# Altium PCB 练一练2.PcbDoc
Units mm, origin at the board's own origin, x right, y up, seen from the top; angles counter-clockwise.
Board outline 63.12 x 67.17 mm, 2 copper layers (Top Layer, Bottom Layer); 89 components, 74 nets, 357 pads, 100 vias.
Unrouted connection lines stored in the file: 59.
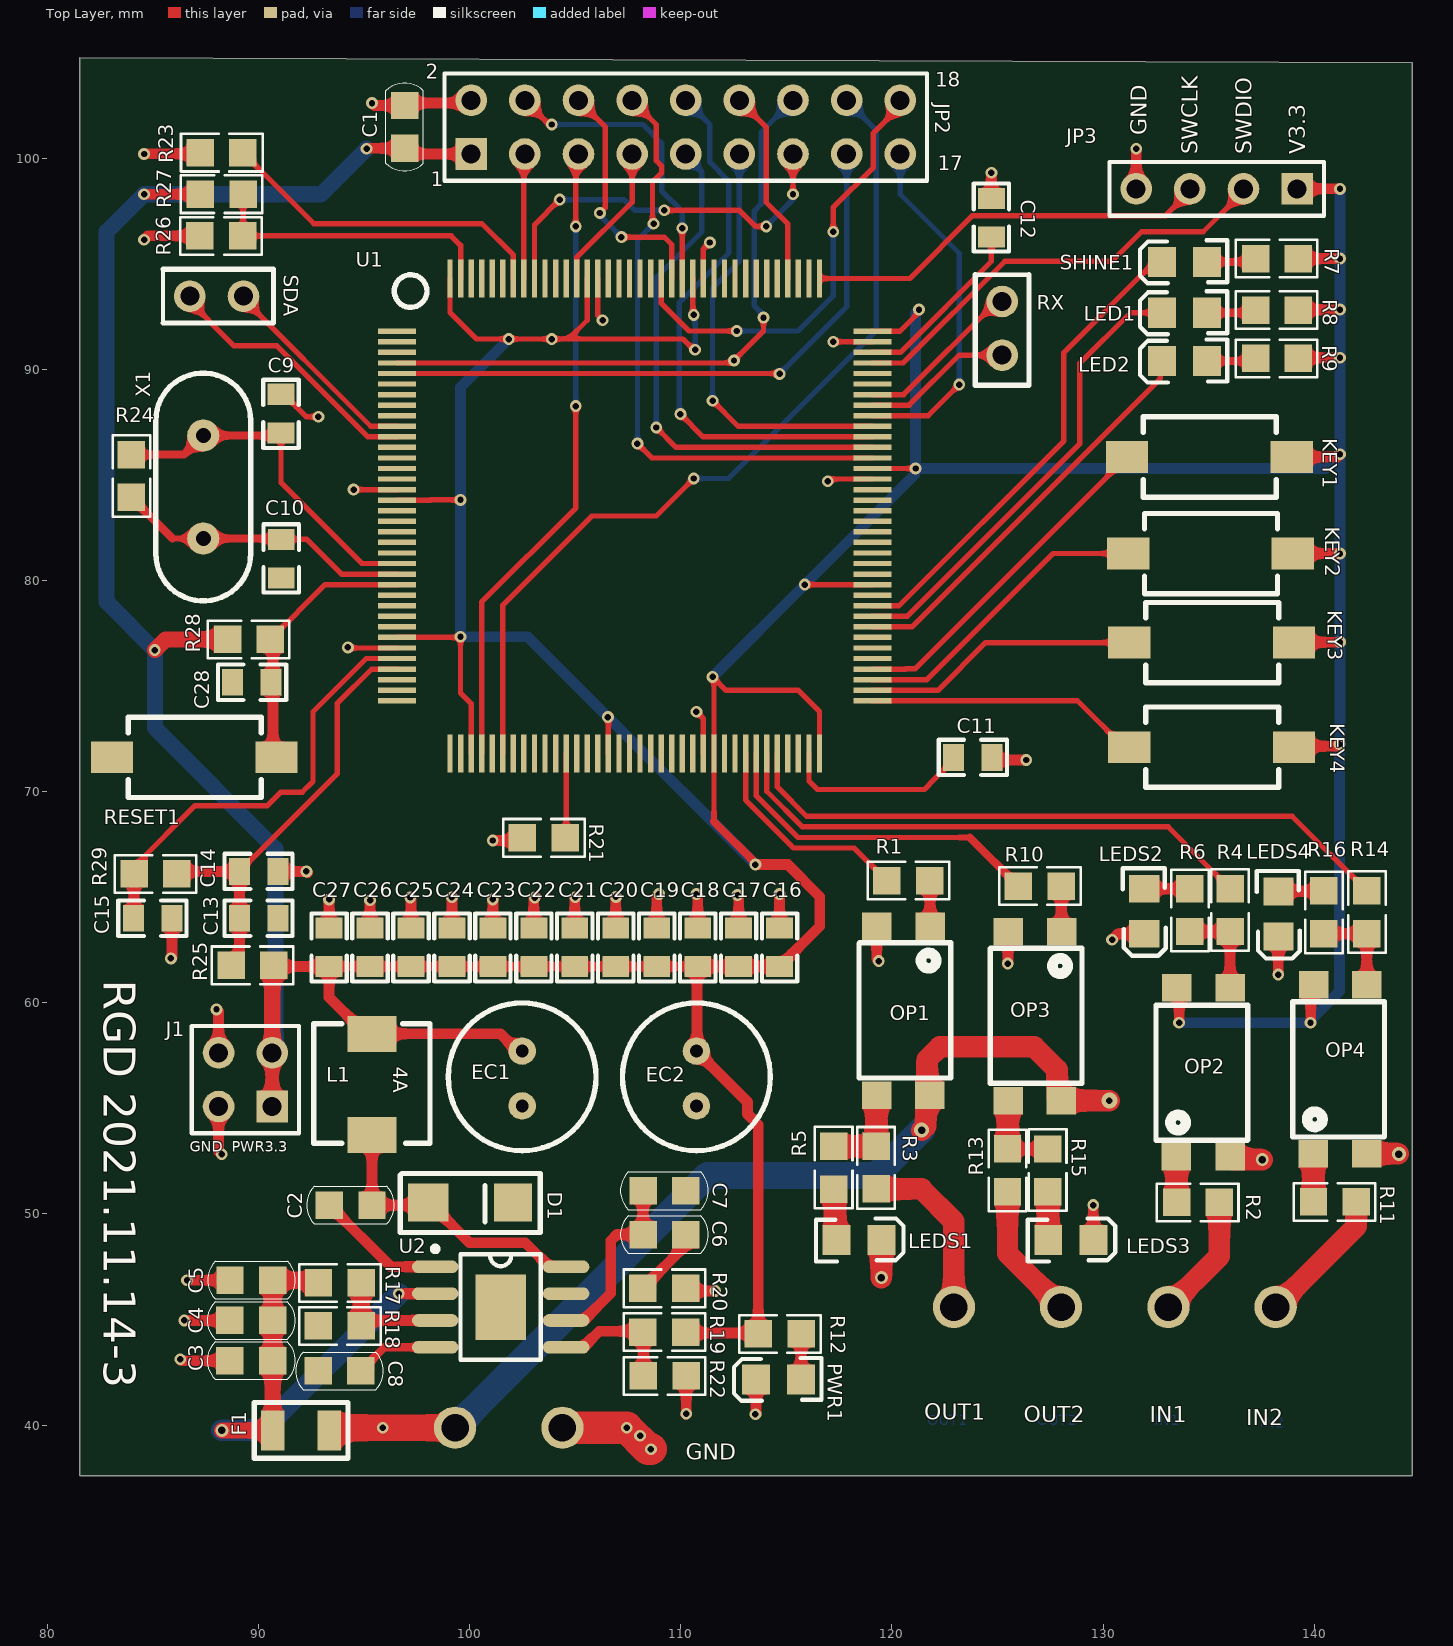
[diagram p0: Top Layer view]
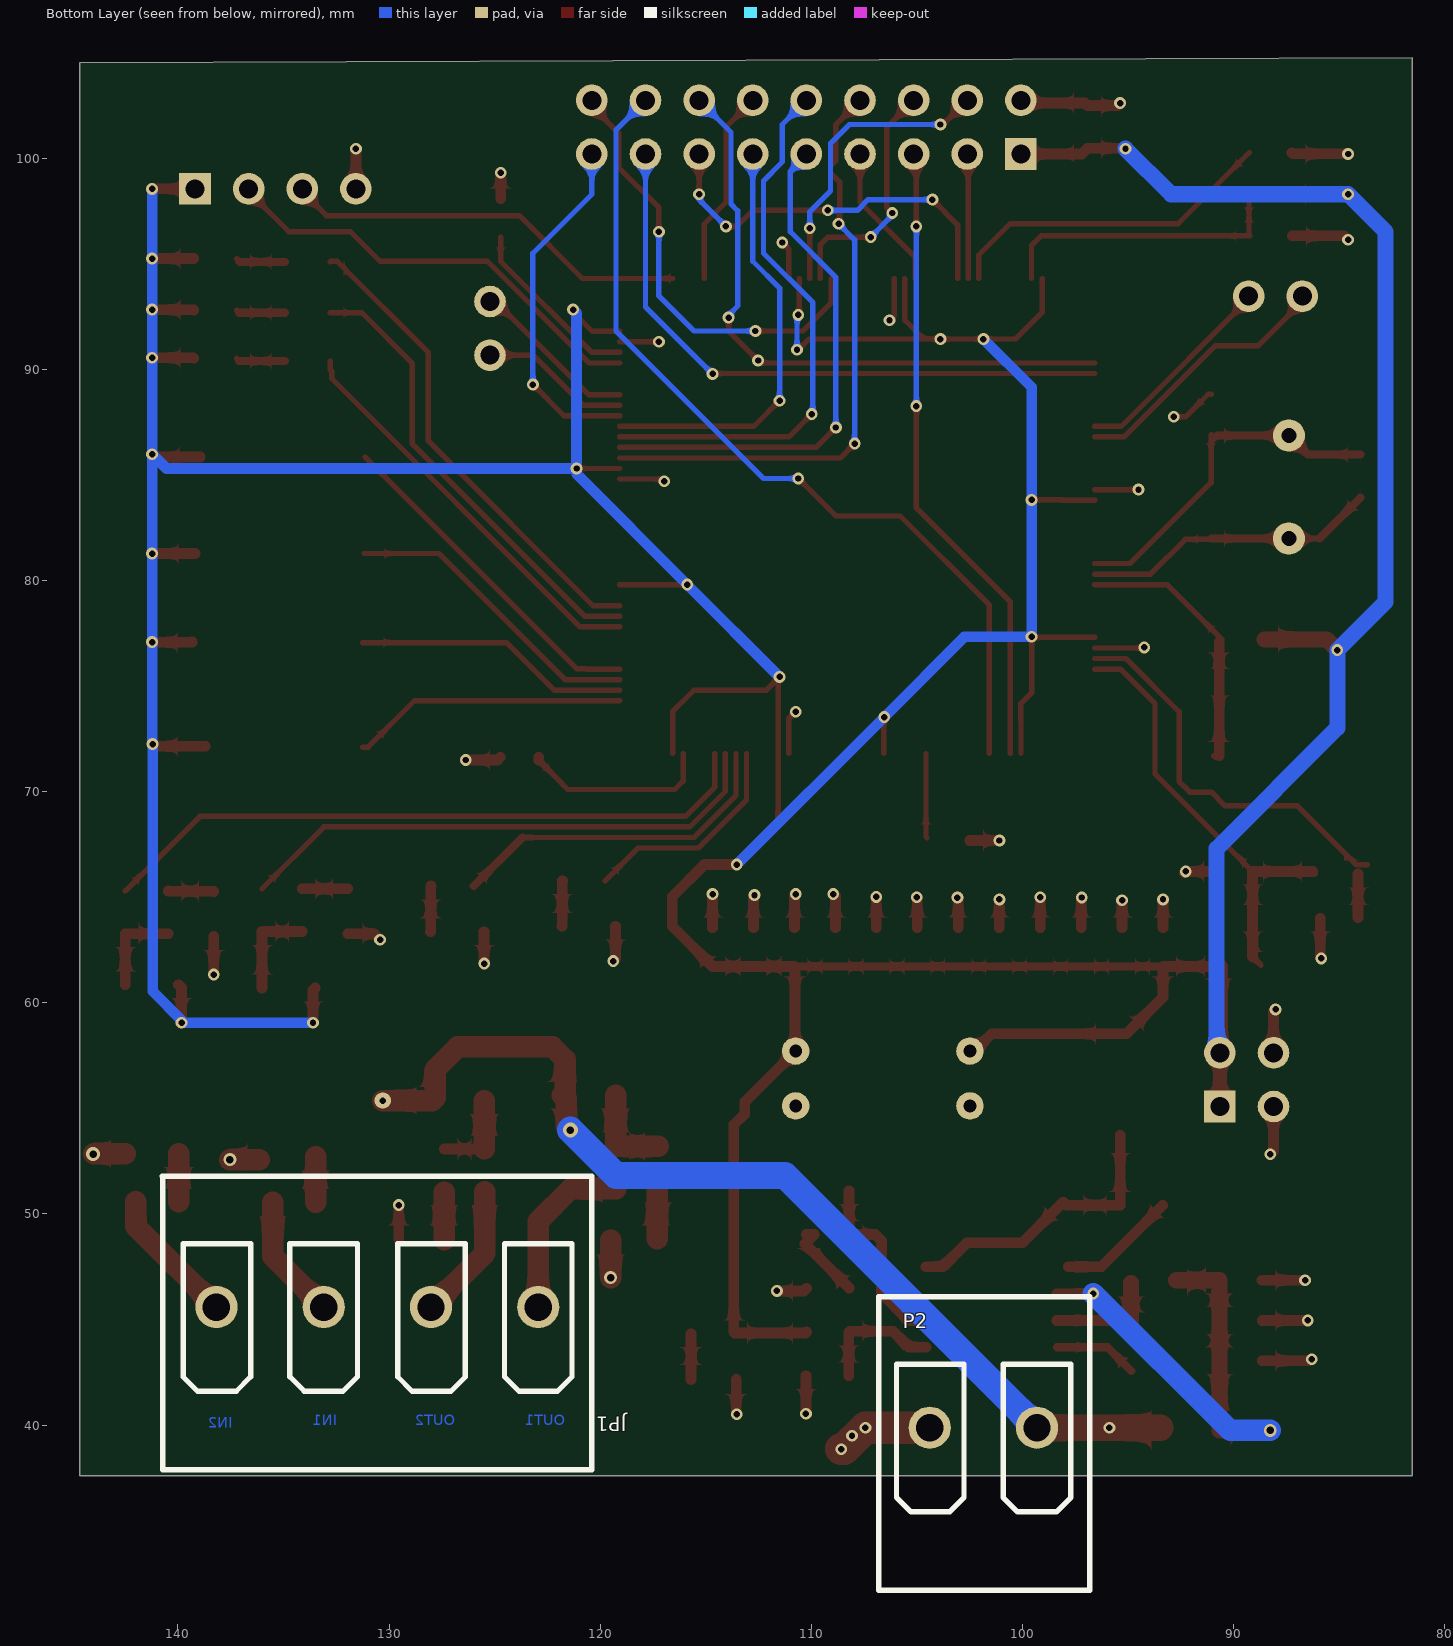
[diagram p1: Bottom Layer view, seen from below]
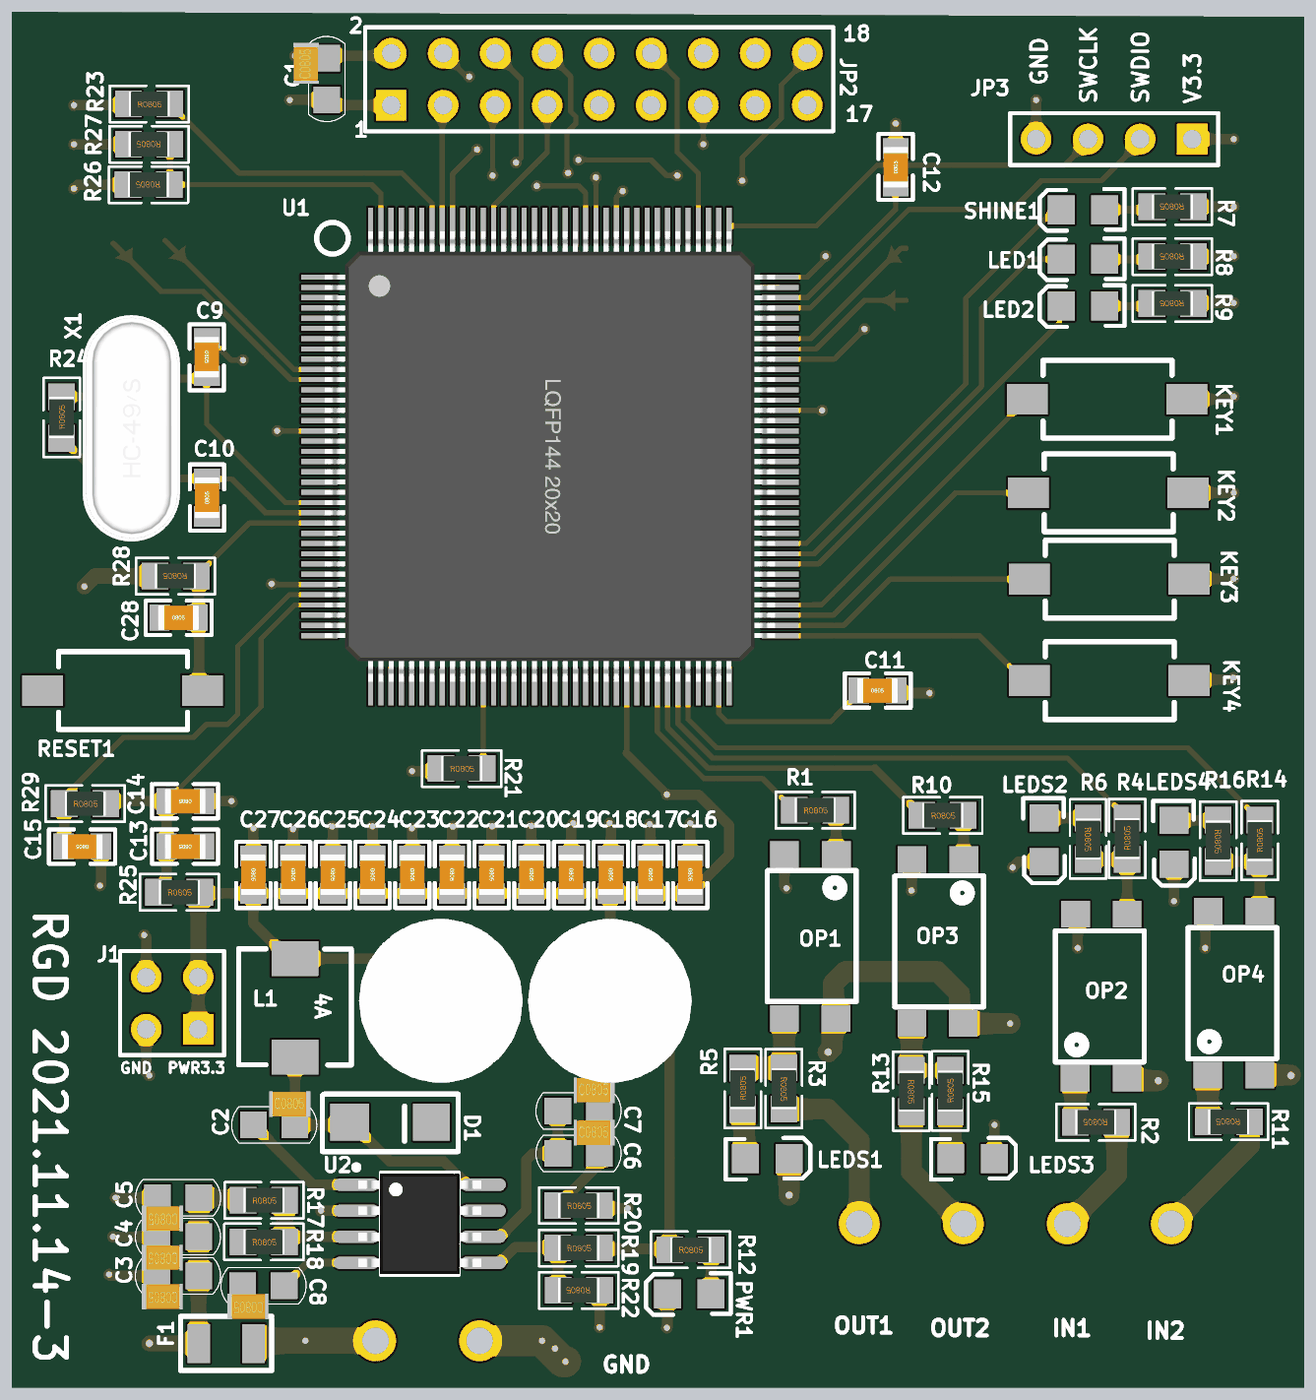
[diagram p2: 3D render of the assembled board from above, using the file's embedded part models]

## Layer stack, top to bottom
Top Solder: solder mask 0.0102, Solder Resist, Dk 3.5
Top Layer: signal copper 0.0356
Dielectric 1: dielectric 0.32, FR-4, Dk 4.8
Bottom Layer: signal copper 0.0356
Bottom Solder: solder mask 0.0102, Solder Resist, Dk 3.5

## Board outline
81.534,37.592 81.534,104.764 144.651,104.52 144.653,104.521 144.653,37.592

## Design rules (kind name [scope] priority, off if disabled: settings)
Clearance [All] p1: gap=0.127 ignorepadtopadclearanceinfootprint=FALSE
MinimumSolderMaskSliver [All] p1: minsoldermaskwidth=0.051
PolygonConnect [All] p1: connectstyle=Relief reliefconductorwidth=0.254 reliefentries=4 polygonreliefangle="90 Angle" airgapwidth=0.254
RoutingVias [All] p1: holewidth=0.305 width=0.559 viastyle="Through Hole" minholewidth=0.305 minwidth=0.559 maxholewidth=0.305 maxwidth=0.559
SilkToSilkClearance [All] p1: silktosilkclearance=0.051
SilkToSolderMaskClearance [IsPad] p1: minsilkscreentomaskgap=0.051 clearancetoexposedcopper=TRUE
SolderMaskExpansion [All] p1: expansion=0.102
Width Width_PWR [InNetClass('PWR')] p1: maxlimit=1.524 minlimit=0.152 preferedwidth=0.508
Width [All] p2: maxlimit=1.016 minlimit=0.152 preferedwidth=0.254
27 further rules are at their usual default settings.

## Classes and differential pairs
net class CAMERA: DCMI_D0 DCMI_D1 DCMI_D2 DCMI_D3 DCMI_D4 DCMI_D5 DCMI_D6 DCMI_D7 DCMI_HREF DCMI_PCLK DCMI_PWDN DCMI_RESET DCMI_SCL DCMI_SDA DCMI_VSYNC DCMI_XCLK
net class PWR: GND VCC3.3 VCC24

## Components (designator, comment, footprint, x,y, rotation, side; value= is the part's Value field where it differs from the comment)
C1 "104" C0805 96.901,101.6 r90 top
C2 "104" C0805 94.477,50.444 r0 top
C3 "4.7uf" C0805 89.546,43.028 r180 top
C4 "4.7uf" C0805 89.546,44.933 r180 top
C5 "103" C0805 89.553,46.838 r180 top
C6 "102" C0805 109.339,49.053 r0 top
C7 "47pf" C0805 109.339,51.125 r0 top
C8 "103" C0805 93.726,42.545 r180 top
C9 "22P" "C 0805" 91.068,87.91 r270 top
C10 "22P" "C 0805" 91.081,81.039 r90 top
C11 "225" "C 0805" 123.825,71.628 r0 top
C12 "225" "C 0805" 124.714,97.18 r90 top
C13 "10UF" "C 0805" 90.018,64.008 r180 top
C14 "104" "C 0805" 90.018,66.225 r180 top
C15 "104" "C 0805" 84.988,64.008 r180 top
C16 "106" "C 0805" 114.681,62.636 r270 top
C17 "106" "C 0805" 112.741,62.636 r270 top
C18 "104" "C 0805" 110.802,62.636 r270 top
C19 "104" "C 0805" 108.862,62.636 r270 top
C20 "104" "C 0805" 106.922,62.636 r270 top
C21 "104" "C 0805" 104.983,62.636 r270 top
C22 "104" "C 0805" 103.043,62.636 r270 top
C23 "104" "C 0805" 101.104,62.636 r270 top
C24 "104" "C 0805" 99.164,62.636 r270 top
C25 "104" "C 0805" 97.224,62.636 r270 top
C26 "104" "C 0805" 95.285,62.636 r270 top
C27 "104" "C 0805" 93.345,62.636 r270 top
C28 "104" "C 0805" 89.687,75.184 r0 top
D1 "B340A" SMA 100.044,50.521 r180 top
EC1 "47uF/25V" C-7 102.464,57.71 r270 top
EC2 "47uF/25V" C-7 110.719,57.71 r270 top
F1 "0.5A" FUSE0.5A 93.353,39.751 r180 top
J1 "PWR3.3       END" HDR2X2 90.651,55.091 r90 top
JP1 "SWD" IDC1X4-5.08 122.936,45.593 r0 bottom
JP2 "OV2640" HDR2X9 100.076,100.203 r0 top
JP3 "SWD" HDR1X4 139.192,98.552 r180 top
KEY1 "KEY_M" KEY-SMD1 138.938,85.852 r180 top
KEY2 "KEY_M" KEY-SMD1 138.991,81.28 r180 top
KEY3 "KEY_M" KEY-SMD1 139.042,77.064 r180 top
KEY4 "KEY_M" KEY-SMD1 139.042,72.111 r180 top
L1 "6.8μH" Hunter 95.377,56.134 r270 top
LED1 "" LED0805 134.925,92.685 r0 top
LED2 "" LED0805 134.925,90.399 r0 top
LEDS1 "" LED0805 117.373,48.768 r180 top
LEDS2 "" LED0805 131.953,65.405 r90 top
LEDS3 "" LED0805 127.406,48.768 r180 top
LEDS4 "" LED0805 138.303,65.278 r90 top
OP1 "PC817" SMD-4 119.278,63.626 r270 top
OP2 "PC817" SMD-4 136.017,52.705 r90 top
OP3 "PC817" SMD-4 125.501,63.372 r270 top
OP4 "PC817" SMD-4 142.494,52.858 r90 top
P2 "PWR_IN" IDC1X2-5.08 99.314,39.878 r0 bottom
PWR1 "" LED0805 115.697,42.164 r0 top
R1 "330R" R0805 120.784,65.811 r0 top
R2 "2K" R0805 134.486,50.521 r180 top
R3 "1K" R0805 119.278,52.19 r270 top
R4 "330R" R0805 135.992,64.403 r90 top
R5 "2.4K" R0805 117.221,52.197 r90 top
R6 "330R" R0805 134.137,64.382 r270 top
R7 "510R" R0805 138.227,95.225 r180 top
R8 "510R" R0805 138.227,92.786 r180 top
R9 "510R" R0805 138.227,90.5 r180 top
R10 "330R" R0805 127.014,65.557 r0 top
R11 "2K" R0805 140.97,50.546 r180 top
R12 "1K" "R 0805" 114.695,44.348 r0 top
R13 "1K" R0805 125.501,52.063 r270 top
R14 "330R" R0805 142.469,64.302 r90 top
R15 "2.4K" R0805 127.356,52.077 r90 top
R16 "330R" R0805 140.487,64.28 r270 top
R17 "332K" R0805 93.867,46.761 r0 top
R18 "68.1K" "R 0805" 93.86,44.729 r0 top
R19 "10.2K" "R 0805" 109.234,44.435 r0 top
R20 "29.4K" "R 0805" 109.234,46.507 r0 top
R21 "10R" "R 0805" 103.519,67.843 r0 top
R22 "3.24K" R0805 109.234,42.312 r180 top
R23 "10R" "R 0805" 88.262,100.289 r0 top
R24 "1M" "R 0805" 83.956,84.963 r90 top
R25 "10R" "R 0805" 89.727,61.806 r0 top
R26 "0R" "R 0805" 88.222,96.301 r180 top
R27 "0R" "R 0805" 88.249,98.273 r180 top
R28 "10K" "R 0805" 89.537,77.191 r180 top
R29 "0R" "R 0805" 85.132,66.132 r0 top
RESET1 "KEY_M" KEY-SMD1 90.858,71.628 r180 top
RX "USART1" HDR1X2 226.466,530.225 r90 top (schematic designator P3)
SDA "I2C2" HDR1X2 -350.257,194.717 r180 top (schematic designator P1)
SHINE1 "" LED0805 134.925,95.098 r0 top
U1 "STM32F407ZET6" "LQFP144 20X20_M" 107.823,83.058 r270 top
U2 "TPS54331D" SOP8DCDC 98.373,47.498 r0 top
X1 "8M" 49/S_N 87.385,81.991 r90 top

## Footprints (in the part's own frame and the unit in brackets; to place one, negate y for a bottom-side part, rotate by r counter-clockwise, add the part's x,y. Pads: shape width x height; smd on the part's side, far side on the other; paste and mask are expansions set on the pad)
49/S_N [mil] "短型晶振（未加焊）"
  round 60 hole 28: 1(0,0) 2(192,0)
  silkscreen extent -116,-89 308,89, body extent -116,-89 309,88, height 138
C0805 [mm] "Chip Capacitor, 2-Leads, Body 2.05x1.23mm, IPC Medium Density"
  rect 1.3x1.3 smd: 1(-1.125,-0.025) 2(0.9,-0.025)
  silkscreen extent -2.19,-0.91 1.97,0.86, body extent -0.97,-0.64 1.03,0.62, height 1.2
"C 0805" [mm] "无极性贴片电容"
  rect 1x1.27 smd: 1(-0.914,0) 2(0.914,0)
  silkscreen extent -1.6,-0.84 1.63,0.84, body extent -1,-0.61 1,0.61, height 0.51
C-7 [mm]
  round 1.3 hole 0.6: 1(-0.008,0.025) 2(2.592,0.025)
  silkscreen extent -2.29,-3.47 4.71,3.53, body extent -2.77,-3.96 5.23,4.04, height 12.6
FUSE0.5A [mm] "1206"
  rect 1.1x1.9 smd: 1(0,0) 2(2.675,0)
  silkscreen extent -0.89,-1.32 3.56,1.32
HDR1X2 [mm]
  round 1.5 hole 0.9: 1(-439.547,101.244) 2(-437.007,101.244)
  silkscreen extent -440.97,99.97 -435.74,102.51
HDR1X4 [mm] "Connector; Header; 4 Position"
  rect 1.5x1.5 hole 0.9: 1(0,0)
  round 1.5 hole 0.9: 2(2.54,0) 3(5.08,0) 4(7.62,0)
  silkscreen extent -1.27,-1.27 8.89,1.27
HDR2X2 [mm]
  rect 1.5x1.5 hole 0.9: 1(0,0)
  round 1.5 hole 0.9: 2(0,2.54) 3(2.54,0) 4(2.54,2.54)
  silkscreen extent -1.27,-1.27 3.81,3.81
HDR2X9 [mm] "Connector; Header; 9x2 Position"
  rect 1.5x1.5 hole 0.9: 1(0,0)
  round 1.5 hole 0.9: 2(0,2.54) 3(2.54,0) 4(2.54,2.54) 5(5.08,0) 6(5.08,2.54) 7(7.62,0) 8(7.62,2.54) 9(10.16,0) 10(10.16,2.54) 11(12.7,0) 12(12.7,2.54) 13(15.24,0) 14(15.24,2.54) 15(17.78,0) 16(17.78,2.54) 17(20.32,0) 18(20.32,2.54)
  silkscreen extent -1.27,-1.27 21.59,3.81
Hunter [mm] "功率电感dcdc"
  rect 1.7x2.3 smd: 1(-2.4,0) 2(2.4,0)
  silkscreen extent -2.88,-2.75 2.79,2.75
IDC1X2-5.08 [mm]
  round 2 hole 1.3: 1(0,0) 2(5.08,0)
  silkscreen extent -2.5,-6.2 7.5,7.7
IDC1X4-5.08 [mm]
  round 2 hole 1.3: 1(0,0) 2(5.08,0) 3(10.16,0) 4(15.24,0)
  silkscreen extent -2.54,-6.2 17.81,7.7
KEY-SMD1 [mm]
  rect 2x1.5 smd: 1(0,0) 2(7.8,0)
  silkscreen extent 0.73,-1.9 7.03,1.9, body extent -0.06,-1.94 7.83,1.91, height 2.5
LED0805 [mil]
  rect 52x56 smd: 1(0,0) 2(-84,0)
  silkscreen extent -125,-40 38,40
"LQFP144 20X20_M" [mm] "144脚，体宽20x20mm，脚距0.5mm"
  rect 0.254x1.8 smd: 1(-8.75,-11.25) 2(-8.25,-11.25) 3(-7.75,-11.25) 4(-7.25,-11.25) 5(-6.75,-11.25) 6(-6.25,-11.25) 7(-5.75,-11.25) 8(-5.25,-11.25) 9(-4.75,-11.25) 10(-4.25,-11.25) 11(-3.75,-11.25) 12(-3.25,-11.25) 13(-2.75,-11.25) 14(-2.25,-11.25) 15(-1.75,-11.25) 16(-1.25,-11.25) 17(-0.75,-11.25) 18(-0.25,-11.25) 19(0.25,-11.25) 20(0.75,-11.25) 21(1.25,-11.25) 22(1.75,-11.25) 23(2.25,-11.25) 24(2.75,-11.25) 25(3.25,-11.25) 26(3.75,-11.25) 27(4.25,-11.25) 28(4.75,-11.25) 29(5.25,-11.25) 30(5.75,-11.25) 31(6.25,-11.25) 32(6.75,-11.25) 33(7.25,-11.25) 34(7.75,-11.25) 35(8.25,-11.25) 36(8.75,-11.25) 73(8.75,11.25) 74(8.25,11.25) 75(7.75,11.25) 76(7.25,11.25) 77(6.75,11.25) 78(6.25,11.25) 79(5.75,11.25) 80(5.25,11.25) 81(4.75,11.25) 82(4.25,11.25) 83(3.75,11.25) 84(3.25,11.25) 85(2.75,11.25) 86(2.25,11.25) 87(1.75,11.25) 88(1.25,11.25) 89(0.75,11.25) 90(0.25,11.25) 91(-0.25,11.25) 92(-0.75,11.25) 93(-1.25,11.25) 94(-1.75,11.25) 95(-2.25,11.25) 96(-2.75,11.25) 97(-3.25,11.25) 98(-3.75,11.25) 99(-4.25,11.25) 100(-4.75,11.25) 101(-5.25,11.25) 102(-5.75,11.25) 103(-6.25,11.25) 104(-6.75,11.25) 105(-7.25,11.25) 106(-7.75,11.25) 107(-8.25,11.25) 108(-8.75,11.25)
  rect 1.8x0.254 smd: 37(11.25,-8.75) 38(11.25,-8.25) 39(11.25,-7.75) 40(11.25,-7.25) 41(11.25,-6.75) 42(11.25,-6.25) 43(11.25,-5.75) 44(11.25,-5.25) 45(11.25,-4.75) 46(11.25,-4.25) 47(11.25,-3.75) 48(11.25,-3.25) 49(11.25,-2.75) 50(11.25,-2.25) 51(11.25,-1.75) 52(11.25,-1.25) 53(11.25,-0.75) 54(11.25,-0.25) 55(11.25,0.25) 56(11.25,0.75) 57(11.25,1.25) 58(11.25,1.75) 59(11.25,2.25) 60(11.25,2.75) 61(11.25,3.25) 62(11.25,3.75) 63(11.25,4.25) 64(11.25,4.75) 65(11.25,5.25) 66(11.25,5.75) 67(11.25,6.25) 68(11.25,6.75) 69(11.25,7.25) 70(11.25,7.75) 71(11.25,8.25) 72(11.25,8.75) 109(-11.25,8.75) 110(-11.25,8.25) 111(-11.25,7.75) 112(-11.25,7.25) 113(-11.25,6.75) 114(-11.25,6.25) 115(-11.25,5.75) 116(-11.25,5.25) 117(-11.25,4.75) 118(-11.25,4.25) 119(-11.25,3.75) 120(-11.25,3.25) 121(-11.25,2.75) 122(-11.25,2.25) 123(-11.25,1.75) 124(-11.25,1.25) 125(-11.25,0.75) 126(-11.25,0.25) 127(-11.25,-0.25) 128(-11.25,-0.75) 129(-11.25,-1.25) 130(-11.25,-1.75) 131(-11.25,-2.25) 132(-11.25,-2.75) 133(-11.25,-3.25) 134(-11.25,-3.75) 135(-11.25,-4.25) 136(-11.25,-4.75) 137(-11.25,-5.25) 138(-11.25,-5.75) 139(-11.25,-6.25) 140(-11.25,-6.75) 141(-11.25,-7.25) 142(-11.25,-7.75) 143(-11.25,-8.25) 144(-11.25,-8.75)
  silkscreen extent -11.43,-11.39 -9.88,-9.84, body extent -11,-11 11,11, height 1.45
R0805 [mm] "Chip Capacitor, 2-Leads, Body 1.97x1.25mm, IPC Medium Density"
  rect 1.3x1.3 smd: 1(-1.023,-0.025) 2(1.002,-0.025)
  silkscreen extent -1.93,-0.91 1.93,0.86, body extent -1,-0.63 1,0.57, height 0.5
"R 0805" [mm] "Chip Capacitor, 2-Leads, Body 1.97x1.25mm, IPC Medium Density"
  rect 1.3x1.3 smd: 1(-1.023,-0.025) 2(1.002,-0.025)
  silkscreen extent -1.93,-0.91 1.93,0.86, body extent -1,-0.63 1,0.57, height 0.5
SMA [mm] "稳压二极管"
  rect 1.8x1.8 smd: 1(-2,-0.025)
  rect 1.9x1.8 smd: 2(2,-0.025)
  silkscreen extent -3.3,-1.4 3.33,1.4
SMD-4 [mm]
  rect 1.3x1.4 smd: 1(0,2.54) 2(0,0) 3(8,0) 4(8,2.515)
  silkscreen extent 0.79,-0.84 7.19,3.51
SOP8DCDC [mm] "dcdcоƬ"
  oval 2.2x0.6 smd: 1(0,0) 2(0,-1.27) 3(0,-2.54) 4(0,-3.81) 5(6.2,-3.81) 6(6.2,-2.54) 7(6.2,-1.27) 8(6.2,0)
  rect 2.4x3.1 smd: 9(3.1,-1.905)
  silkscreen extent -0.12,-4.41 5,0.97, body extent 0.1,-4.35 6.1,0.55, height 1.75

## Part data
C1 C2 C3 C4 C5 C6 C7 C8: library part Cap0, "Default Capacitor", LatestRevisionDate=17-Jul-2002, LatestRevisionNote="Re-released for DXP Platform.", PackageReference=RAD-0.3, Published=8-Jun-2000, Publisher="Altium Limited"
C9 C10 C11 C12 C13 C14 C15 C28: library part C, "无极性贴片电容", BOM名称=无, 学习资源=www.oooc, 材质=X
C16 C17 C18 C19 C20 C21 C22 C23 C24 C25 C26 C27: library part C
D1: library part "D Zener", "瞬态抑制二极管", LatestRevisionDate=17-Jul-2002, LatestRevisionNote="Re-released for DXP Platform.", PackageDescription="Diode, Thru-Hole; 2 Leads; 0.7 in Pin Spacing", PackageReference=DIODE-0.7, Published=8-Jun-2000, Publisher="Altium Limited"
EC1 EC2: library part Cap2, "Polarized Capacitor (Axial)", LatestRevisionDate=17-Jul-2002, LatestRevisionNote="Re-released for DXP Platform.", PackageDescription="Polarized Capacitor; 2 Leads", PackageReference=POLAR0.8, Published=8-Jun-2000, Publisher="Altium Limited"
F1: library part Fuse1, "Fuse", LatestRevisionDate=17-Jul-2002, LatestRevisionNote="Re-released for DXP Platform.", PackageDescription="Thru-Hole; 2 Leads", PackageReference=PIN-W2/E2.8, Published=8-Jun-2000, Publisher="Altium Limited"
J1: library part "Header 2X2", "Header, 2-Pin, Dual row", LatestRevisionDate=17-Jul-2002, LatestRevisionNote="Re-released for DXP Platform.", Publisher="Altium Limited"
JP1 JP3: library part "Header 4", "4P接插件", BOM名称=4P, 学习资源=www.oooc
JP2: library part "Header 9X2", "Header, 9-Pin, Dual row", LatestRevisionDate=17-Jul-2002, LatestRevisionNote="Re-released for DXP Platform.", Publisher="Altium Limited"
L1: library part Inductor, "Inductor", Code_IEC=1005, Code_JEITA=0402, LatestRevisionDate=17-Jul-2002, LatestRevisionNote="Re-released for DXP Platform.", PackageReference=0402-A, Published=8-Jun-2000, Publisher="Altium Limited"
LED1 LED2 LEDS1 LEDS2 LEDS3 LEDS4 PWR1 SHINE1: library part LED-SMD, "贴片LED", BOM名称=Ì, 学习资源=www.oooc
OP1 OP2 OP3 OP4: library part Optoisolator, "4-Pin Phototransistor Optocoupler", DatasheetDocument=Nov-2003, LatestRevisionDate=04-Mar-2005, LatestRevisionNote="Sch pins 3 & 4 Swapped.", PackageReference=DIP-4, Published=24-Mar-1999, Publisher="Altium Limited"
P2 RX SDA: library part "Header 1x2"
R1 R2 R10 R11: library part R_1
R3 R4 R5 R6 R13 R14 R15 R16: library part R_3
R7 R8 R9 R12 R21 R23 R24 R25 R26 R27 R28: library part R, "贴片电阻", BOM名称=Ì, 学习资源=www.oooc
R17 R18 R19 R20 R22: library part Res0, "default resistor"
R29: library part R
U2: library part TPS54331DDAR, "TPS54331DDAR"
X1: library part XTAL, "Crystal Oscillator"

## Via types
v1: diameter 0.559, hole 0.305, Top Layer to Bottom Layer, tented both sides, 94 vias
v2: diameter 0.61, hole 0.356, Top Layer to Bottom Layer, tented both sides, 3 vias
v3: diameter 0.711, hole 0.356, Top Layer to Bottom Layer, tented both sides, 1 vias
v4: diameter 0.66, hole 0.356, Top Layer to Bottom Layer, tented both sides, 1 vias
v5: diameter 0.762, hole 0.305, Top Layer to Bottom Layer, tented both sides, 1 vias

## Nets (pads, with @x,y where several pads share a name; then routed paths per layer and width w, separated by ;. In a path a pad name is that pad's centre, name@x,y a point inside that pad or via, vN(x,y) a via of type N, cw(c..) or ccw(c..) an arc to the next point about the centre after c; other vN are vias at no path point)
BOOT0: R23.2 U1.138 | length 15.9
  Top Layer w0.254: R23.2 92.625,96.901 100.584,96.901 102.073,95.412 U1.138
BOOT1: R21.2 U1.48 | length 4
  Top Layer w0.254: R21.2 104.573,67.87 U1.48
DCMI_D0: JP2.8 U1.96 | length 28.8
  Top Layer w0.254: JP2.8 108.839,101.6 108.839,99.89 109.093,99.636 109.093,99.314 108.661,98.882 108.661,96.952 v1(108.712,96.901) ; v1(107.95,86.487) 108.629,85.808 U1.96
  Bottom Layer w0.254: v1(107.95,86.487) 107.95,96.139 v1(108.712,96.901)
DCMI_D1: JP2.9 U1.97 | length 24.8
  Top Layer w0.254: v1(108.839,87.249) 109.78,86.308 U1.97
  Bottom Layer w0.254: v1(108.839,87.249) 108.839,94.361 110.998,96.52 110.998,99.366 110.236,100.128 JP2.9
DCMI_D2: JP2.10 U1.98 | length 26.5
  Top Layer w0.254: v1(109.982,87.884) 111.058,86.808 U1.98 ; JP2.10@110.236,102.489 JP2.10
  Bottom Layer w0.254: v1(109.982,87.884) 109.931,87.935 109.931,93.167 112.268,95.504 112.268,98.933 111.379,99.822 111.379,101.6 JP2.10
DCMI_D3: JP2.11 U1.99 | length 20.3
  Top Layer w0.254: v1(111.506,88.519) 112.717,87.308 U1.99
  Bottom Layer w0.254: v1(111.506,88.519) 111.506,93.853 112.776,95.123 JP2.11
DCMI_D4: JP2.12 U1.112 | length 9.4
  Top Layer w0.254: JP2.12 114.046,101.473 114.046,97.917 115.073,96.89 U1.112
DCMI_D5: JP2.13 U1.136 | length 18.5
  Top Layer w0.254: U1.136 103.073,96.85 v1(104.267,98.044) ; v1(109.22,97.536) 112.776,97.536 113.538,96.774 v1(114.046,96.774) ; v1(115.316,98.298) JP2.13
  Bottom Layer w0.254: v1(104.267,98.044) 107.315,98.044 107.823,97.536 v1(109.22,97.536) ; v1(114.046,96.774) 115.316,98.044 v1(115.316,98.298)
DCMI_D6: JP2.14 U1.4 | length 29.8
  Top Layer w0.254: U1.4 112.406,90.308 v1(112.522,90.424) 113.919,91.821 v1(113.919,92.456)
  Bottom Layer w0.254: v1(113.919,92.456) 113.919,92.583 113.487,93.015 113.487,97.513 113.805,97.832 113.805,101.232 JP2.14
DCMI_D7: JP2.15 U1.5 | length 29.8
  Top Layer w0.254: U1.5 v1@114.681,89.808
  Bottom Layer w0.254: v1(114.681,89.789) 117.856,92.964 JP2.15
DCMI_HREF: JP2.5 U1.40 | length 30.3
  Top Layer w0.254: U1.40 100.573,78.983 105.029,83.439 v1(105.029,88.265) ; JP2.5@104.775,100.203 105.029,99.949 v1(105.029,96.774)
  Bottom Layer w0.254: v1(105.029,88.265) v1(105.029,96.774)
DCMI_PCLK: JP2.16 U1.42 | length 41.8
  Top Layer w0.254: U1.42 101.573,78.84 105.791,83.058 108.839,83.058 v1(110.617,84.836) ; JP2.16 JP2.16@118.11,102.743
  Bottom Layer w0.254: v1(110.617,84.836) 112.268,84.836 119.253,91.821 119.253,101.346 JP2.16
DCMI_PWDN: JP2.18 U1.124 | length 21.1
  Top Layer w0.254: U1.124 109.073,93.139 110.391,91.821 v1(112.649,91.821) ; v1(117.221,96.52) 117.221,97.663 119.126,99.568 119.126,101.191 120.396,102.461 JP2.18
  Bottom Layer w0.254: v1(112.649,91.821) 115.556,91.821 117.221,93.486 v1(117.221,96.52)
DCMI_RESET: JP2.7 U1.132 | length 7
  Top Layer w0.254: U1.132 105.073,95.294 107.696,97.917 JP2.7
DCMI_SCL: JP2.4 U1.122 | length 14.1
  Top Layer w0.254: JP2.4 103.759,101.6 v1(103.886,101.6) ; U1.122 v1(110.073,96.683)
  Bottom Layer w0.254: v1(103.886,101.6) 108.204,101.6 109.093,100.711 109.093,98.453 110.073,97.473 v1(110.073,96.683)
DCMI_SDA: JP2.6 U1.123 | length 11.7
  Top Layer w0.254: JP2.6 106.426,101.473 106.426,97.663 v1(106.172,97.409) ; v1(107.188,96.266) 109.22,96.266 109.573,95.913 U1.123
  Bottom Layer w0.254: v1(106.172,97.409) 106.172,97.282 v1(107.188,96.266)
DCMI_VSYNC: JP2.3 U1.137 | length 5.9
  Top Layer w0.254: U1.137 102.573,100.16 JP2.3
DCMI_XCLK: JP2.17 U1.100 | length 16.8
  Top Layer w0.254: U1.100 121.717,87.808 v1(123.19,89.281)
  Bottom Layer w0.254: JP2.17 120.396,98.298 123.19,95.504 v1(123.19,89.281)
GND: C1.2 C3.2 C4.2 C5.2 C7.2 C8.2 C9.1 C10.1 C11.2 C12.2 C13.1 C14.1 C15.1 C16.1 C17.1 C18.1 C19.1 C20.1 C21.1 C22.1 C23.1 C24.1 C25.1 C26.1 C27.1 C28.1 D1.1 EC1.2 EC2.2 J1.2 J1.4 JP2.2 JP3.4 LEDS1.2 LEDS2.2 LEDS3.2 LEDS4.2 OP1.2 OP2.2 OP3.2 OP4.2 P2.2 PWR1.2 R18.1 R20.2 R21.1 R22.1 R23.1 R26.2 RESET1.2 U1.16 U1.31 U1.38 U1.51 U1.61 U1.83 U1.94 U1.107 U1.120 U1.130 U2.7 | length 88
  Top Layer w0.254: C9.1 91.203,88.824 92.27,87.757 v1(92.837,87.757) ; v1(94.234,76.835) 94.261,76.808 U1.31 ; v1@94.488,84.328 v1(94.508,84.308) U1.16 ; U1.130 106.073,92.555 v1(106.299,92.329) ; v1(110.744,73.787) 111.073,73.458 U1.61 ; U1.120 111.073,95.706 v1(111.379,96.012) ; v1(116.967,84.709) 117.066,84.808 U1.94 ; v1(117.221,91.313) 119.068,91.313 U1.107
  Top Layer w0.508: v1(84.582,96.139) 84.769,96.326 R26.2 ; v1(84.582,100.203) 84.592,100.213 87.188,100.213 R23.1 ; v1(85.852,62.103) 85.903,62.154 C15.1 ; v1@86.36,43.053 C3.2 ; v1(86.487,44.958) C4.2 ; v1(86.614,46.863) C5.2 ; v1(88.011,59.69) 88.111,59.59 J1.4 ; J1.2 88.111,52.986 v1(88.265,52.832) ; C14.1 v1(92.271,66.225) v1@92.329,66.167 ; C27.1 v1(93.345,64.897) ; C26.1 v1(95.285,64.862) ; v1(95.377,102.616) 95.493,102.5 C1.2 97.048,102.621 100.081,102.621 JP2.2@100.203,102.743 ; C25.1 v1@97.224,64.955 ; C24.1 v1(99.164,65.001) v1@99.187,65.024 ; v1(101.092,64.897) 101.104,64.885 C23.1 ; v1(101.092,67.691) R21.1@102.496,67.691 ; C22.1 103.043,64.943 v1(103.084,64.984) v1@103.124,65.024 ; C21.1 104.983,64.978 v1(105.006,65.001) v1@105.029,65.024 ; C20.1 106.922,65.012 v1(106.928,65.018) v1@106.934,65.024 ; C19.1 108.862,65.047 v1(108.966,65.151) ; v1@110.236,40.513 v1(110.258,40.535) R22.1 ; R20.2 110.363,46.355 v1(111.633,46.355) ; v1(110.744,65.151) 110.802,65.093 C18.1 ; C17.1 v1@112.741,65.059 ; v1(113.538,40.513) 113.563,40.538 PWR1.2 ; C16.1 v1(114.681,65.151) ; OP1.2 119.278,62.078 v1(119.38,61.976) ; C12.2 v1(124.714,99.314) ; C11.2 124.866,71.501 v1(126.365,71.501) ; v1@125.476,61.849 v1(125.489,61.862) 125.501,61.874 OP3.2 ; LEDS3.2 v1(129.54,50.419) ; v1(130.429,62.992) 130.708,63.271 LEDS2.2 ; JP3.4 v1(131.572,100.457) ; OP2.2 OP2.2@136.144,52.578 ; v1(138.303,61.341) LEDS4.2 ; v4@143.992,52.858 v4(144.018,52.832)
  Top Layer w1.016: v2(119.507,46.99) LEDS1.2 ; OP2.2@136.144,52.578 v2(137.541,52.578) ; OP4.2 v4@143.992,52.858
  Top Layer w1.524: P2.2 v1(107.442,39.878) 108.458,38.862 v1(108.585,38.862)
  other v1: 108.077,39.497 86.296,43.116 97.19,64.989 112.695,65.105
I2C2_SCL: SDA.2 U1.11 | length 12.8
  Top Layer w0.254: SDA.2@86.487,93.472 88.841,91.118 90.873,91.118 95.183,86.808 U1.11
I2C2_SDA: SDA.1 U1.10 | length 10.2
  Top Layer w0.254: SDA.1@89.027,93.599 95.318,87.308 U1.10
KEY0: KEY1.2 U1.76 | length 16.2
  Top Layer w0.254: U1.76 120.639,75.808 120.65,75.819 121.105,75.819 KEY1.2
KEY1: KEY2.2 U1.75 | length 14.6
  Top Layer w0.254: U1.75 121.663,75.308 127.635,81.28 KEY2.2
KEY2: KEY3.2 U1.74 | length 13.1
  Top Layer w0.254: U1.74 121.007,74.808 121.013,74.803 122.174,74.803 124.435,77.064 KEY3.2
KEY3: KEY4.2 U1.73 | length 13.1
  Top Layer w0.254: U1.73 128.794,74.308 130.992,72.111 KEY4.2
LED0: LED1.2 U1.81 | length 21.9
  Top Layer w0.254: U1.81 120.726,78.308 128.905,86.487 128.905,90.297 131.293,92.685 LED1.2
LED1: LED2.2 U1.80 | length 19.4
  Top Layer w0.254: U1.80 120.949,77.808 132.715,89.574 132.715,89.916 132.791,89.992 LED2.2
NetC2_1: C2.1 U2.1 | length 5.7
  Top Layer w0.508: C2.1 96.273,47.498 U2.1@97.823,47.498
NetC2_2: C2.2 D1.2 L1.2 U2.8 | length 13.8
  Top Layer w0.508: L1.2 C2.2 97.917,50.419 D1.2 98.094,50.546 99.999,48.641 102.63,48.641 103.773,47.498 U2.8
NetC3_1: C3.1 C4.1 C5.1 F1.2 R17.1 U2.2 | length 24.5
  Top Layer w0.254: F1.2@90.671,39.758 F1.2 ; C4.1 C4.1@90.678,44.965 ; R17.1@92.717,46.863 R17.1
  Top Layer w0.508: v1(96.647,46.228) U2.2
  Top Layer w0.762: v2(88.265,39.751) F1.2 ; F1.2@90.671,39.758 C3.1 C4.1 ; C4.1@90.678,44.965 C5.1 R17.1@92.717,46.863
  Bottom Layer w1.016: v2(88.265,39.751) 90.17,39.751 v1(96.647,46.228)
NetC6_1: C6.1 C7.1 U2.6 | length 8.9
  Top Layer w0.508: U2.6 105.398,44.958 106.68,46.24 106.68,48.73 106.978,49.028 C6.1 C7.1
NetC6_2: C6.2 R20.1 | length 4
  Top Layer w0.508: R20.1 108.211,46.493 110.303,48.585 109.861,49.028 C6.2
NetC8_1: C8.1 U2.4 | length 4
  Top Layer w0.381: C8.1 95.969,43.688 U2.4
NetC9_2: C9.2 R24.2 U1.23 X1.2 | length 16.8
  Top Layer w0.254: C9.2@90.764,86.868 C9.2@90.941,86.69 ; C9.2@91.068,86.91 91.068,86.69 91.068,84.639 94.9,80.808 U1.23
  Top Layer w0.381: R24.2 86.482,85.965 X1.2 C9.2@90.764,86.868
NetC10_2: C10.2 R24.1 U1.24 X1.1 | length 14.1
  Top Layer w0.254: 85.93,81.991 X1.1 ; C10.2@91.043,81.991 C10.2 92.291,81.953 93.936,80.308 U1.24
  Top Layer w0.381: R24.1 85.93,81.991 ; X1.1 C10.2@91.043,81.991
NetC11_1: C11.1 U1.71 | length 9
  Top Layer w0.254: U1.71 116.073,70.502 116.471,70.104 121.539,70.104 121.784,70.349 121.784,70.367 C11.1@122.911,71.493
  Top Layer w0.508: C11.1@122.911,71.493 C11.1
NetC12_1: C12.1 U1.106 | length 8.6
  Top Layer w0.254: U1.106 120.399,90.808 124.714,95.123 C12.1
NetLED1_1: LED1.1 R8.2 | length 2.4
  Top Layer w0.254: R8.2@137.098,92.685 R8.2
  Top Layer w0.381: LED1.1 R8.2@137.098,92.685
NetLED2_1: LED2.1 R9.2 | length 2.4
  Top Layer w0.254: R9.2@137.098,90.399 R9.2
  Top Layer w0.381: LED2.1 R9.2@137.098,90.399
NetLEDS1_1: LEDS1.1 R5.1 | length 2.5
  Top Layer w0.508: R5.1 R5.1@117.31,51.11 ; LEDS1.1@117.31,48.832 LEDS1.1
  Top Layer w1.016: LEDS1.1@117.31,48.832 R5.1@117.31,51.11
NetLEDS2_1: LEDS2.1 R6.1 | length 2.2
  Top Layer w0.508: LEDS2.1 R6.1
NetLEDS3_1: LEDS3.1 R15.1 | length 2.3
  Top Layer w0.508: R15.1 R15.1@127.394,51.041 ; LEDS3.1@127.394,48.781 LEDS3.1
  Top Layer w1.016: LEDS3.1@127.394,48.781 R15.1@127.394,51.041
NetLEDS4_1: LEDS4.1 R16.1 | length 2.2
  Top Layer w0.508: LEDS4.1 138.316,65.291 140.449,65.291 R16.1
NetOP1_1: OP1.1 R1.2 | length 2.2
  Top Layer w0.508: R1.2 121.802,65.77 121.802,63.642 OP1.1
NetOP1_3: OP1.3 R3.1 R5.2 | length 4.4
  Top Layer w0.508: R5.2 R5.2@117.254,53.206 ; R3.1@119.246,53.206 R3.1 R3.1@119.266,53.226 ; OP1.3@119.266,55.613 OP1.3
  Top Layer w1.016: R5.2@117.254,53.206 R3.1@119.246,53.206 ; R3.1@119.266,53.226 OP1.3@119.266,55.613
NetOP2_1: OP2.1 R2.2 | length 2.2
  Top Layer w0.508: OP2.1 OP2.1@133.481,52.701 ; R2.2@133.481,50.55 R2.2
  Top Layer w1.016: R2.2@133.481,50.55 OP2.1@133.481,52.701
NetOP2_3: OP2.3 R4.1 R6.2 | length 4.6
  Top Layer w0.508: R6.2 R4.1 OP2.3
NetOP3_1: OP3.1 R10.2 | length 2.2
  Top Layer w0.508: R10.2 128.029,65.519 128.029,63.385 OP3.1
NetOP3_3: OP3.3 R13.1 R15.2 | length 4.2
  Top Layer w0.508: R13.1@125.489,53.099 R13.1 125.48,53.082 127.377,53.082 R15.2 ; OP3.3@125.489,55.359 OP3.3
  Top Layer w1.016: R13.1@125.489,53.099 OP3.3@125.489,55.359
NetOP4_1: OP4.1 R11.2 | length 2.3
  Top Layer w0.508: OP4.1 OP4.1@139.961,52.851 ; R11.2@139.961,50.579 R11.2
  Top Layer w1.016: R11.2@139.961,50.579 OP4.1@139.961,52.851
NetOP4_3: OP4.3 R14.1 R16.2 | length 4.5
  Top Layer w0.508: R16.2 R14.1 OP4.3
NetPWR1_1: PWR1.1 R12.2 | length 2.2
  Top Layer w0.508: PWR1.1 R12.2
NetR7_2: R7.2 SHINE1.1 | length 2.4
  Top Layer w0.254: R7.2@137.073,95.098 R7.2
  Top Layer w0.381: SHINE1.1 R7.2@137.073,95.098
NetR17_2: R17.2 R18.2 U2.3 | length 5.6
  Top Layer w0.381: R18.2 94.869,44.711 R18.2@95.116,44.958
  Top Layer w0.508: R18.2@95.116,44.958 U2.3
  Top Layer w0.762: R18.2@94.869,44.711 R17.2
NetR19_1: R19.1 R22.2 U2.5 | length 6.1
  Top Layer w0.508: U2.5 105.373,43.688 106.135,44.45 108.171,44.45 R19.1 108.233,44.388 R22.2
NetR26_1: R26.1 R27.1 U1.143 | length 14.1
  Top Layer w0.254: R27.1 89.272,96.353 R26.1 99.127,96.326 99.573,95.88 U1.143
PE12: R1.1 U1.65 | length 10.5
  Top Layer w0.254: U1.65 113.073,69.608 115.347,67.334 118.213,67.334 R1.1
PE13: R10.1 U1.66 | length 16.2
  Top Layer w0.254: U1.66 113.573,69.815 115.554,67.834 123.689,67.834
  Top Layer w0.381: 123.689,67.834 R10.1
PE14: R4.2 U1.67 | length 25.6
  Top Layer w0.254: U1.67 114.073,70.022 115.761,68.334 133.088,68.334 R4.2
PE15: R14.2 U1.68 | length 31.5
  Top Layer w0.254: U1.68 114.573,70.229 115.968,68.834 138.963,68.834 R14.2
PLC1: JP1.1 R3.2 | length 8.4
  Top Layer w1.016: R3.2 121.405,51.188 122.936,49.657 JP1.1
PLC2: JP1.2 R13.2 | length 6.5
  Top Layer w1.016: R13.2 125.476,48.133 JP1.2
PLC3: JP1.3 R2.1 | length 6
  Top Layer w1.016: JP1.3 135.509,48.006 R2.1
PLC4: JP1.4 R11.1 | length 6.6
  Top Layer w1.016: JP1.4 141.993,49.41 R11.1
RESET: C28.2 R28.1 RESET1.1 U1.25 | length 12.8
  Top Layer w0.254: R28.1@90.687,77.089 R28.1 93.152,79.808 U1.25 ; RESET1.1 RESET1.1@90.941,71.711
  Top Layer w0.508: RESET1.1@90.687,71.711 90.687,75.311 R28.1@90.687,77.089
SHINE: SHINE1.2 U1.82 | length 22.9
  Top Layer w0.254: U1.82 120.337,78.808 128.143,86.614 128.143,90.805 132.461,95.123 132.766,95.123 SHINE1.2
SWDCLK: JP3.3 U1.109 | length 19.4
  Top Layer w0.254: U1.109 120.851,94.308 123.825,97.282 132.969,97.282 134.112,98.425 JP3.3
SWDIO: JP3.2 U1.105 | length 20.9
  Top Layer w0.254: U1.105 120.534,90.308 125.349,95.123 130.429,95.123 131.826,96.52 134.747,96.52 136.373,98.146 JP3.2@136.703,98.146
USART1_RX: RX.2 U1.102 | length 8
  Top Layer w0.254: U1.102 120.558,88.808 124.968,93.218 RX.2
USART1_TX: RX.1 U1.101 | length 7.1
  Top Layer w0.254: U1.101 120.82,88.308 123.19,90.678 RX.1
VCC3.3: C1.1 C16.2 C17.2 C18.2 C19.2 C20.2 C21.2 C22.2 C23.2 C24.2 C25.2 C26.2 C27.2 EC1.1 EC2.1 J1.1 J1.3 JP2.1 JP3.1 KEY1.1 KEY2.1 KEY3.1 KEY4.1 L1.1 OP2.4 OP4.4 R7.1 R8.1 R9.1 R12.1 R19.2 R25.2 R27.2 R28.2 U1.17 U1.30 U1.39 U1.52 U1.62 U1.72 U1.84 U1.95 U1.108 U1.121 U1.131 U1.144 | length 341.1
  Top Layer w0.254: U1.30 99.533,77.308 v1(99.568,77.343) 99.568,74.676 100.076,74.168 100.076,73.376 100.073,73.373 U1.39 ; U1.17 98.134,83.808 98.146,83.82 v1(99.568,83.82) ; U1.144 99.073,92.697 100.33,91.44 v1(101.854,91.44) v1(103.886,91.44) 104.684,91.44 ; U1.131 105.573,92.329 104.684,91.44 ; v1(106.553,73.533) 106.573,73.513 U1.52 ; U1.121 110.573,92.627 v1(110.617,92.583) ; v1(110.68,90.932) 110.617,90.932 110.109,91.44 104.684,91.44 ; 111.573,68.58 U1.62 111.573,75.289 111.506,75.356 v1(111.506,75.438) 112.141,74.803 115.57,74.803 116.573,73.8 U1.72 ; v1(115.876,79.808) U1.84 ; U1.95 v1(121.122,85.308) ; U1.108 120.383,91.808 121.285,92.71 v1(121.285,92.837)
  Top Layer w0.381: R25.2@90.856,61.849 R25.2@90.983,61.722 ; C27.2 C26.2 C25.2 C24.2 C23.2 C22.2 C21.2 C20.2 C19.2 C18.2 ; 111.573,68.58 v1@113.605,66.548
  Top Layer w0.508: v1(84.582,98.298) R27.2 ; R25.2@90.983,61.722 C27.2 93.345,60.266 95.077,58.534 L1.1 101.459,58.534 102.275,57.718 EC1.1 ; v1(95.123,100.457) 95.141,100.475 C1.1 97.198,100.203 JP2.1 JP2.1@100.203,100.203 ; R19.2 110.279,44.366 113.629,44.366 113.672,44.41 113.672,54.222 113.157,54.737 113.157,55.305 EC2.1 110.773,57.747 110.773,61.693 C18.2 C17.2 C16.2 116.586,63.627 116.586,65.024 115.062,66.548 v1@113.605,66.548 ; OP2.4 133.604,60.603 v1(133.604,59.055) ; KEY4.1@138.706,72.158 141.105,72.158 v1(141.2,72.253) ; KEY1.1 141.097,85.852 v1(141.224,85.979) ; KEY2.1@139.192,81.28 v1(141.224,81.28) ; JP3.1 v1(141.224,98.552) ; R9.1 139.276,90.551 v1(141.224,90.551) ; R8.1 139.266,92.827 141.214,92.827 v1(141.224,92.837) ; R7.1 v1(141.224,95.25) ; KEY3.1@139.319,77.089 139.329,77.079 141.214,77.079 v1(141.224,77.089) ; v1(139.827,59.055) 139.837,59.065 139.837,60.716 OP4.4
  Top Layer w0.635: J1.1 J1.3
  Top Layer w0.762: v1(85.09,76.708) 85.598,77.216 R28.2 ; J1.3 R25.2@90.651,61.702
  Bottom Layer w0.254: v1(110.617,92.583) 110.68,92.519 v1(110.68,90.932)
  Bottom Layer w0.508: v1(101.854,91.44) 99.568,89.154 v1(99.568,83.82) v1(99.568,77.343) 102.743,77.343 v1(106.553,73.533) v1(113.538,66.548) ; v1(111.506,75.438) v1(115.876,79.808) 121.112,85.044 121.112,85.298 v1(121.122,85.308) ; v1(121.285,92.837) 121.122,92.674 v1(121.122,85.308) ; v1(133.604,59.055) v1(139.827,59.055) 139.827,59.182 141.2,60.555 v1(141.2,72.253) 141.224,72.277 v1(141.224,77.089) v1(141.224,81.28) v1(141.224,85.979) ; v1(141.224,98.552) v1(141.224,95.25) v1(141.224,92.837) v1(141.224,90.551) v1(141.224,85.979) ; v1(121.122,85.308) 140.539,85.308 141.21,85.979 v1(141.224,85.979)
  Bottom Layer w0.762: J1.3 90.805,57.785 90.805,67.31 85.09,73.025 v1(85.09,76.708) 82.804,78.994 82.804,96.52 v1(84.582,98.298) 92.964,98.298 v1(95.123,100.457)
VCC24: F1.1 OP1.4 OP3.4 P2.1 | length 48.2
  Top Layer w0.381: F1.1 F1.1@93.48,39.878
  Top Layer w1.016: v3(121.412,53.975) 121.601,54.164 121.601,55.484 121.743,55.626 OP1.4 121.666,55.753 121.666,57.317 122.261,57.912 126.746,57.912 127.824,56.834 127.824,55.514 127.966,55.372 OP3.4 v5(130.302,55.372)
  Top Layer w1.27: F1.1@93.48,39.878 v1(95.885,39.878) P2.1
  Bottom Layer w1.27: P2.1 111.252,51.816 119.253,51.816 v3(121.412,53.975)
VDDA: C13.2 C14.2 R25.1 R29.2 U1.33 | length 21.1
  Top Layer w0.254: R29.2 R29.2@86.251,66.225 ; R25.1 R25.1@89.103,62.179 ; C14.2@89.103,66.36 C14.2 89.171,66.293 93.726,70.848 93.726,74.168 95.366,75.808 U1.33
  Top Layer w0.508: R29.2@86.251,66.225 C14.2 C13.2 R25.1@89.103,62.179
VREF+: C15.2 R29.1 U1.32 | length 21
  Top Layer w0.254: R29.1@83.68,66.535 84.188,66.535 86.995,69.342 90.424,69.342 91.059,69.977 92.075,69.977 92.583,70.485 92.583,73.787 95.104,76.308 U1.32 ; C15.2 C15.2@84.108,64.042
  Top Layer w0.508: C15.2@84.108,64.042 R29.1
pads on no net: U1.1 U1.2 U1.3 U1.6 U1.7 U1.8 U1.9 U1.12 U1.13 U1.14 U1.15 U1.18 U1.19 U1.20 U1.21 U1.22 U1.26 U1.27 U1.28 U1.29 U1.34 U1.35 U1.36 U1.37 U1.41 U1.43 U1.44 U1.45 U1.46 U1.47 U1.49 U1.50 U1.53 U1.54 U1.55 U1.56 U1.57 U1.58 U1.59 U1.60 U1.63 U1.64 U1.69 U1.70 U1.77 U1.78 U1.79 U1.85 U1.86 U1.87 U1.88 U1.89 U1.90 U1.91 U1.92 U1.93 U1.103 U1.104 U1.110 U1.111 U1.113 U1.114 U1.115 U1.116 U1.117 U1.118 U1.119 U1.125 U1.126 U1.127 U1.128 U1.129 U1.133 U1.134 U1.135 U1.139 U1.140 U1.141 U1.142 U2.9

## Polygon pours and split planes (outlines as drawn)
no net on Top Layer "Top Layer-No Net" (solid, pour order 14): 81.661,104.648

## Other copper
Bottom Layer:
  text "OUT1" at 121.666,40.005 h0.51
  text "OUT2" at 126.873,40.005 h0.51
  text "IN1" at 132.461,40.005 h0.51
  text "IN2" at 137.414,39.878 h0.51

## Silkscreen, mask and mechanical layers (free items; w line width, h text height)
Top Overlay:
  text "GND" at 132.08,101.092 h0.76 r90
  text "SWCLK" at 134.493,100.203 h0.76 r90
  text "SWDIO" at 137.033,100.203 h0.76 r90
  text "V3.3" at 139.573,100.203 h0.76 r90
  text "RGD 2021.11.14-3" at 82.677,61.087 h1.52 r270
  text "GND  PWR3.3" at 86.741,52.959 h0.51
  text "OUT1" at 121.539,40.259 h0.76
  text "OUT2" at 126.238,40.132 h0.76
  text "IN1" at 132.207,40.132 h0.76
  text "IN2" at 136.779,40.005 h0.76
  text "GND" at 110.236,38.354 h0.76
Mechanical 1:
  lines w0.254: 81.534,37.592 144.653,37.592 144.653,104.521
Mechanical 13:
  lines w0.254: 81.534,37.592 81.534,104.764 144.651,104.52

## Dimensions
81.534,37.592 to 81.534,104.764 on Mechanical 13
81.534,37.592 to 144.78,37.719 on Mechanical 13

## Text inside footprints (layer, text, board x,y; h text height)
JP2: Top Overlay "18" at 122.047,103.378 h0.7; Top Overlay "17" at 122.174,99.441 h0.7; Top Overlay "1" at 98.171,98.679 h0.7; Top Overlay "2" at 97.917,103.759 h0.7
L1: Top Overlay "4A" at 96.393,56.972 h0.7 r270